# Altium PCB charger.PcbDoc
Units mil, origin at the board's own origin, x right, y up, seen from the top; angles counter-clockwise.
Board outline 944.88 x 2023.62 mil, 2 copper layers (Top Layer, Bottom Layer); 41 components, 29 nets, 116 pads, 90 vias.
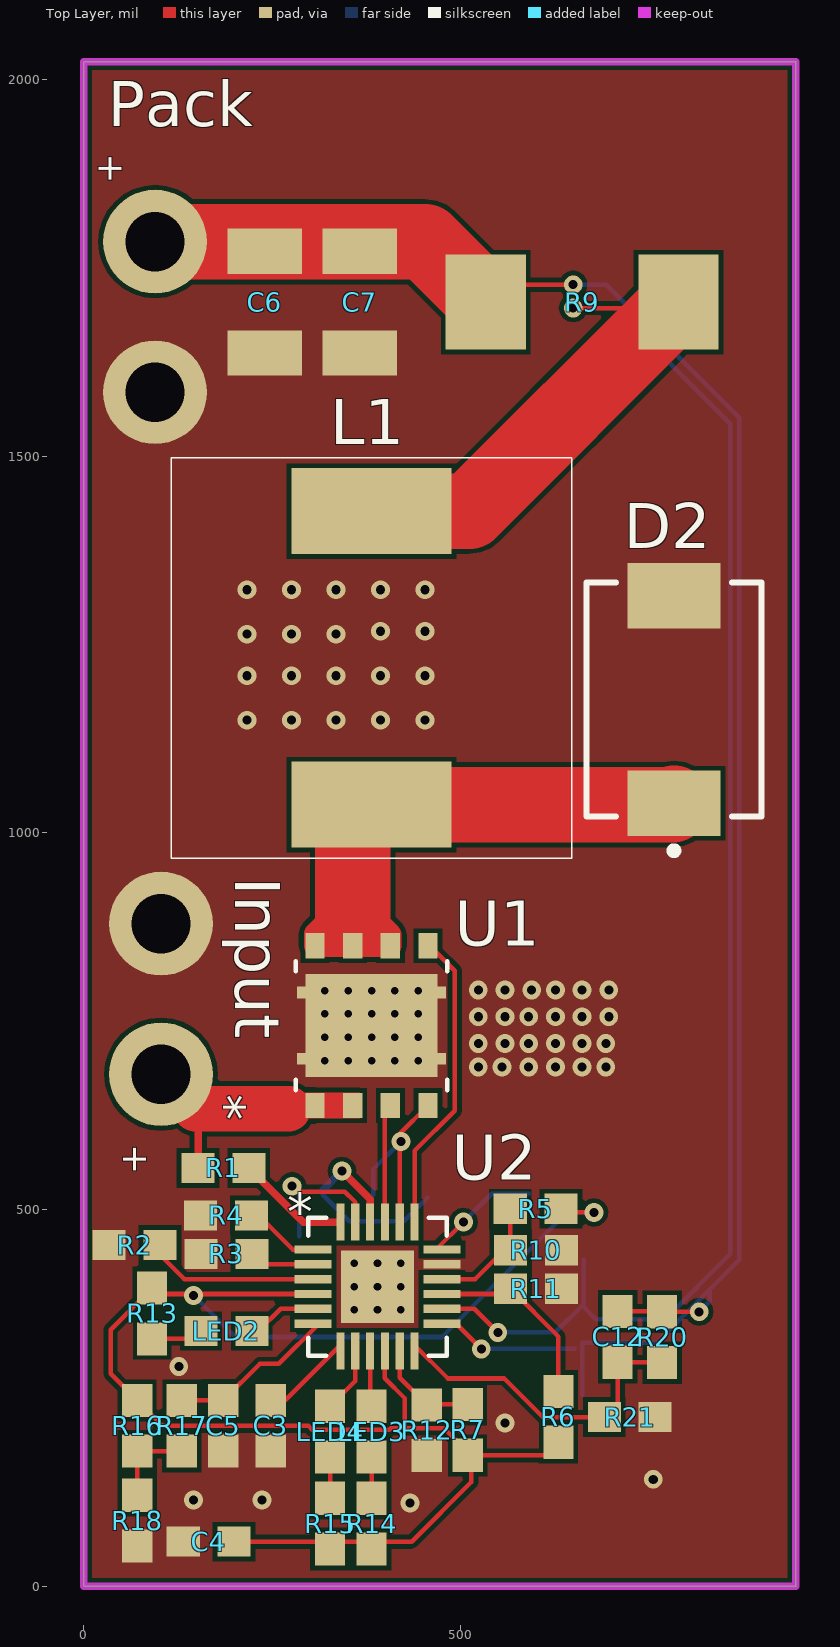
[diagram p0: Top Layer view]
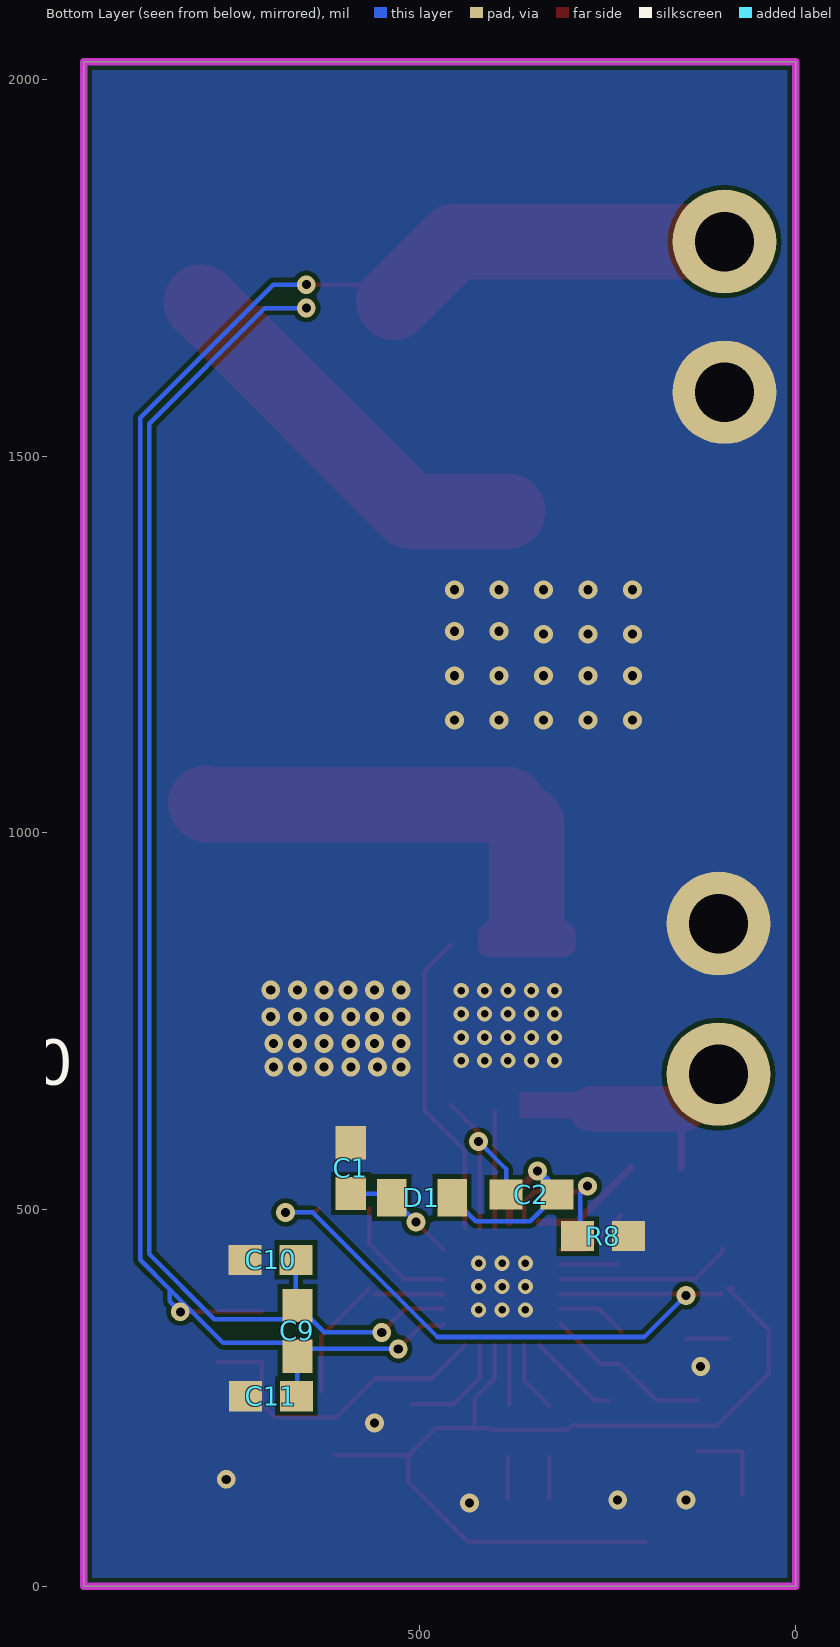
[diagram p1: Bottom Layer view, seen from below]

## Layer stack, top to bottom
Top Solder: solder mask 0.4, Solder Resist, Dk 3.5
Top Layer: signal copper 1.4
Dielectric 1: dielectric 12.6, FR-4, Dk 4.8
Bottom Layer: signal copper 1.4
Bottom Solder: solder mask 0.4, Solder Resist, Dk 3.5

## Board outline
0,0 944.88,0 944.88,2023.62 0,2023.62

## Design rules (kind name [scope] priority, off if disabled: settings)
Clearance [All] p1: gap=6
PolygonConnect [All] p1: connectstyle=Direct reliefconductorwidth=10 reliefentries=4 polygonreliefangle="90 Angle" airgapwidth=10
RoomDefinition charger [InComponentClass('charger')] p1: confinementstyle=ConfineIn formatcopy=TRUE lockcomponents=FALSE outline 2600.3,25.91 2835.3,25.91 2835.3,355.91 2600.3,355.91
RoutingVias [All] p1: holewidth=12 width=25 viastyle="Through Hole" minholewidth=12 minwidth=25 maxholewidth=28 maxwidth=50
SolderMaskExpansion [All] p1: expansion=4
UnpouredPolygon [All] p1: allowunpoured=FALSE
Width [All] p1: maxlimit=196.85 minlimit=6 preferedwidth=6
29 further rules are at their usual default settings.

## Components (designator, comment, footprint, x,y, rotation, side; value= is the part's Value field where it differs from the comment)
C1 "0.1uf" 0603 590.55,555.12 r270 bottom
C2 "0.1uf" 0603 350.39,519.69 r0 bottom
C3 "56nF" 0603 248.03,212.6 r90 top
C4 "1uF" 0603 165.35,59.06 r0 top
C5 "0.1uf" 0603 185.04,212.6 r90 top
C6 "47uf" 1210 240.16,1704.72 r90 top
C7 "47uf" 1210 366.14,1704.72 r90 top
C9 "0.1uf" 0603 661.42,338.58 r90 bottom
C10 "0.1uf" 0603 696.85,433.07 r0 bottom
C11 "0.1uf" 0603 696.85,251.97 r180 bottom
C12 "22p" 0603 708.66,330.71 r90 top
D1 "Diode" 0805 496.06,515.75 r180 bottom
D2 "Diode" SMC 783.46,1177.17 r90 top
Input "Battery_AWG12" BATTERY_AWG12 102.36,779.53 r90 top
L1 "Inductor" GDRH127 381.89,1232.28 r90 top
LED2 "LED0" 0603 188.98,338.58 r0 top
LED3 "LED0" 0603 381.89,204.72 r90 top
LED4 "LED0" 0603 326.77,204.72 r90 top
Pack "Battery_AWG12" BATTERY_AWG12 94.49,1685.04 r270 top
R1 "10R" 0603 185.04,555.12 r0 top
R2 "100k" 0603 66.93,452.76 r0 top
R3 "100k" 0603 188.98,440.95 r0 top
R4 "100k" 0603 188.98,492.13 r180 top
R5 "100k" 0603 599.95,500.99 r180 top
R6 "100k" 0603 629.92,224.41 r90 top
R7 "100k" 0603 509.57,207.13 r90 top
R8 "100k" 0603 255.91,464.57 r180 bottom
R9 "10mR" 2512 661.42,1704.72 r180 top
R10 "32.4k" 0603 599.95,445.87 r0 top
R11 "10k" 0603 599.95,394.69 r0 top
R12 "22.1k" 0603 455.23,207.13 r270 top
R13 "300R" 0603 90.55,362.21 r270 top
R14 "300R" 0603 381.89,82.68 r90 top
R15 "300R" 0603 326.77,82.68 r90 top
R16 "9.31k" 0603 70.87,212.6 r90 top
R17 "100R" 0603 129.92,212.6 r90 top
R18 "430k" 0603 70.87,86.61 r90 top
R20 "50k" 0603 767.72,330.71 r270 top
R21 "10k" 0603 724.41,224.41 r0 top
U1 "CSD87352Q5D_DQY_" CSD87352Q5D 381.89,744.09 r90 top
U2 "BQ24610_RGE_24" BQ24610 389.76,397.64 r0 top

## Footprints (in the part's own frame and the unit in brackets; to place one, negate y for a bottom-side part, rotate by r counter-clockwise, add the part's x,y. Pads: shape width x height; smd on the part's side, far side on the other; paste and mask are expansions set on the pad)
0603 [mil] "0603-RES"
  rect 44x40 smd: 1(-33.46,0) 2(34,0)
0805 [mil]
  rect 39.37x50 smd: 1(-40,0) 2(40,0)
  body extent -50,-30 50,30, height 31
1210 [mm]
  rect 1.52x2.5 smd: 1(-1.715,0) 2(1.715,0)
2512 [mm]
  rect 2.7x3.2 smd: 1(-3.25,0) 2(3.25,0)
BATTERY_AWG12 [mm]
  round 3.5 hole 2: 1(-2.54,0) 2(2.54,0)
BQ24610 [mm]
  rect 1.25x0.28 smd paste-0.14: 1(-2.175,1.25) 2(-2.175,0.75) 3(-2.175,0.25) 4(-2.175,-0.25) 5(-2.175,-0.75) 6(-2.175,-1.25) 13(2.175,-1.25) 14(2.175,-0.75) 15(2.175,-0.25) 16(2.175,0.25) 17(2.175,0.75) 18(2.175,1.25)
  rect 0.28x1.25 smd paste-0.14: 7(-1.25,-2.175) 8(-0.75,-2.175) 9(-0.25,-2.175) 10(0.25,-2.175) 11(0.75,-2.175) 12(1.25,-2.175) 19(1.25,2.175) 20(0.75,2.175) 21(0.25,2.175) 22(-0.25,2.175) 23(-0.75,2.175) 24(-1.25,2.175)
  rect 2.45x2.45 smd: 25(0,0)
  silkscreen extent -2.33,-2.33 2.33,2.33
CSD87352Q5D [mm]
  rect 0.85x0.65 smd paste-0.412: 1(-2.692,1.905) 2(-2.692,0.635) 3(-2.692,-0.635) 4(-2.692,-1.905) 5(2.692,-1.905) 6(2.692,-0.635) 7(2.692,0.635) 8(2.692,1.905)
  rect 0.4x0.3 smd: 9(-1.118,2.362) 9(-1.118,-2.362) 9(1.118,2.362) 9(1.118,-2.362)
  rect 3.48x4.46 smd paste-2.217 mask-2.222: 9(0,0)
  Top Layer region: 0,-2.23 0,-2.23 0,-2.23 0,-2.23 0,-2.23 0,-2.23 0,-2.23 0,-2.23
  Top Layer region: 0,2.23 0,2.23 0,2.23 0,2.23 0,2.23 0,2.23 0,2.23 0,2.23
  Top Layer region: -2.267,2.135 -3.117,2.135 -3.117,0.405 -2.267,0.405
  silkscreen extent -2.18,-2.55 2.18,2.55
GDRH127 [mm]
  rect 2.9x5.4 smd: 1(-4.95,0) 2(4.95,0)
  silkscreen extent -6.75,-6.75 6.75,6.75
SMC [mm]
  rect 2.2x3.15 smd: 1(-3.5,0) 2(3.5,0)
  silkscreen extent -5.22,-2.95 3.95,2.95

## Part data
C1 C2 C3 C4 C5 C6 C7 C9 C10 C11 C12: library part CAP0402-CAP, "电容"
D1 D2: "Default Diode"
LED2 LED3 LED4: "Typical INFRARED GaAs LED"
R1 R2 R3 R4 R5 R6 R7 R8 R9 R10 R11 R12 R13 R14 R15 R16 R17 R18 R20 R21: library part Res2, "电阻"
U1 U2: "Imported"

## Via types
v1: diameter 25/25 (per signal layer), hole 12, Top Layer to Bottom Layer, 50 vias
v2: diameter 20/20 (per signal layer), hole 10, Top Layer to Bottom Layer, 29 vias
v3: diameter 25, hole 12, Top Layer to Bottom Layer, 11 vias

## Nets (pads, with @x,y where several pads share a name; then routed paths per layer and width w, separated by ;. In a path a pad name is that pad's centre, name@x,y a point inside that pad or via, vN(x,y) a via of type N, cw(c..) or ccw(c..) an arc to the next point about the centre after c; other vN are vias at no path point)
GND: C1.1 C3.1 C4.1 C5.1 C6.1 C7.1 C10.2 C11.1 D2.2 Input.2 Pack.2 R2.1 R3.1 R4.2 R8.2 R10.2 R11.2 R12.2 R18.1 R21.2 U1.9 U2.17 U2.25
  other v1: 433.07,110.24 145.67,114.17 236.22,114.17 755.91,141.73 559.06,216.54 125.98,291.34 523.62,688.98 555.12,688.98 590.55,688.98 625.98,688.98 661.42,688.98 692.91,688.98 523.62,720.47 559.06,720.47 590.55,720.47 625.98,720.47 661.42,720.47 692.91,720.47 523.62,755.91 559.06,755.91 590.55,755.91 625.98,755.91 661.42,755.91 696.85,755.91 523.62,791.34 559.06,791.34 594.49,791.34 625.98,791.34 661.42,791.34 696.85,791.34 216.54,1149.61 275.59,1149.61 334.65,1149.61 393.7,1149.61 452.76,1149.61 216.54,1208.66 275.59,1208.66 334.65,1208.66 393.7,1208.66 452.76,1208.66 216.54,1263.78 275.59,1263.78 334.65,1263.78 393.7,1267.72 452.76,1267.72 216.54,1322.83 275.59,1322.83 334.65,1322.83 393.7,1322.83 452.76,1322.83
  other v2: 358.76,366.64 389.76,366.64 420.76,366.64 358.76,397.64 389.76,397.64 420.76,397.64 358.76,428.64 389.76,428.64 420.76,428.64 319.89,697.59 350.89,697.59 381.89,697.59 412.89,697.59 443.89,697.59 319.89,728.59 350.89,728.59 381.89,728.59 412.89,728.59 443.89,728.59 319.89,759.59 350.89,759.59 381.89,759.59 412.89,759.59 443.89,759.59 319.89,790.59 350.89,790.59 381.89,790.59 412.89,790.59 443.89,790.59
NetC1_2: C1.2 D1.1 U2.18 | length 154
  Top Layer w6: U2.18@467.52,446.85 v3(503.94,483.27)
  Bottom Layer w6: v3(503.94,483.27) 503.94,483.62 D1.1 541.43,521.12 C1.2@590.55,521.12
NetC2_1: C2.1 D1.2 U2.22 | length 286.5
  Top Layer w10: v3(342.52,551.18) 379.92,513.78 U2.22
  Bottom Layer w6: C2.1 352.36,484.25 424.57,484.25 D1.2
  Bottom Layer w10: C2.1@316.93,525.59 v3(342.52,551.18)
NetC2_2: C2.2 U1.4 U2.20 | length 266.8
  Top Layer w6: U2.20@419.3,475.39 U2.20 v3@419.3,588.65 ; v3(421.11,590.46) v3@419.3,588.65 ; U1.4 419.3,600.5 v3@419.3,588.65
  Bottom Layer w6: C2.2 384.39,553.75 v3(421.11,590.46)
NetC3_2: C3.2 U2.7 | length 122.9
  Top Layer w6: C3.2 267.26,246.6 U2.7@340.54,319.88
NetC5_2: C5.2 R17.2 U2.6 | length 224.3
  Top Layer w6: R17.2 C5.2 233.72,295.28 258.86,295.28 U2.6@312.01,348.42
NetC6_2: C6.2 C7.2 C9.1 C11.2 C12.2 Pack.1 R9.2 R20.1 U2.13 | length 2674.5
  Top Layer w6: U2.13@467.52,348.42 470.52,345.42 497.09,345.42 v3(527.56,314.96) ; R9.2 556.59,1727.85 v3(649.61,1727.85) ; C12.2 R20.1@767.18,364.71 ; R20.1 v3(816.93,364.17)
  Top Layer w100: Pack.1 453.15,1785.04 R9.2
  Bottom Layer w6: v3(527.56,314.96) C9.1@651.58,314.96 ; v3(649.61,1727.85) 693.41,1727.85 870.27,1550.99 870.27,433.26 830.71,393.7 ; C11.2@661.42,253.4 661.42,322.83 759.84,322.83 830.71,393.7 ; v3(816.93,364.17) 830.71,377.95 830.71,393.7
NetC9_2: C9.2 C10.1 L1.2 R9.1 U2.14 | length 2549.4
  Top Layer w6: U2.14@467.52,368.11 518.25,368.11 v3(549.48,336.88) ; v3(649.61,1696.85) R9.1@781.49,1696.85
  Top Layer w100: L1.2 511.81,1427.16 781.49,1696.85 R9.1
  Bottom Layer w6: v3(549.48,336.88) 625.72,336.88 C9.2 679.67,354.33 771.65,354.33 858.27,440.94 858.27,1543.31 704.72,1696.85 v3(649.61,1696.85) ; C9.2@663.38,374.55 C10.1
NetC12_1: C12.1 R20.2 R21.1 U2.12 | length 430.2
  Top Layer w6: U2.12@438.99,319.88 483.28,275.59 558.01,275.59 609.19,224.41 R21.1 708.66,242.13 C12.1 R20.2@767.18,297.24
NetD2_2: D2.1 L1.1 U1.6 U1.7 U1.8 | length 724.6
  Top Layer w30: 330.71,889.76 306.89,865.95 U1.8 U1.7 U1.6 406.89,864.76 381.89,889.76
  Top Layer w100: 356.89,889.76 L1.1@356.89,1012.4 ; L1.1 781.5,1037.4 D2.1
NetLED2_1: LED2.1 R13.2 | length 54.6
  Top Layer w6: R13.2@90.55,328.2 LED2.1@145.14,328.2
NetLED2_2: LED2.2 U2.5 | length 92.4
  Top Layer w6: LED2.2@231.8,338.58 261.32,368.11 U2.5@312.01,368.11
NetLED3_1: LED3.1 R14.2 | length 54.6
  Top Layer w6: R14.2 LED3.1
NetLED3_2: LED3.2 U2.9 | length 79.2
  Top Layer w6: LED3.2@379.92,240.7 U2.9@379.92,319.88
NetLED4_1: LED4.1 R15.2 | length 54.6
  Top Layer w6: R15.2 LED4.1
NetLED4_2: LED4.2 U2.8 | length 95
  Top Layer w6: LED4.2 360.23,272.18 U2.8@360.23,319.88
NetR1_2: R1.2 U2.24 | length 151.3
  Top Layer w10: R1.2 290.89,483.27 U2.24
NetR2_2: R2.2 U2.3 | length 235
  Top Layer w6: R2.2@96.99,448.82 96.99,443.96 133.47,407.48 U2.3@312.01,407.48
NetR3_2: R3.2 U2.2 | length 75.3
  Top Layer w6: R3.2@236.76,427.17 U2.2@312.01,427.17
NetR4_1: R4.1 U2.1 | length 99
  Top Layer w6: R4.1@231.8,492.13 277.07,446.85 U2.1@312.01,446.85
NetR5_2: R5.2 R10.1 U2.16 | length 164.6
  Top Layer w6: U2.16@467.52,407.48 519.28,407.48 565.95,454.16 R5.2
NetR6_2: R6.2 R11.1 U2.15 | length 254.6
  Top Layer w6: U2.15@467.52,387.79 R11.1@559.59,387.79 ; R11.1 629.92,331.26 R6.2
NetR7_2: R7.2 R12.1 U2.11 | length 148.3
  Top Layer w6: U2.11@419.3,319.88 419.3,276.53 454.7,241.13 R7.2
NetR8_1: R8.1 U2.23 | length 189.5
  Top Layer w6: v3(276.43,530.96) 283.77,523.62 346.46,523.62 360.23,509.85 U2.23
  Bottom Layer w6: v3(276.43,530.96) 285.93,521.46 R8.1@285.93,464.57
NetR16_1: R16.1 R17.1 R18.2 | length 117.6
  Top Layer w6: R18.2 R16.1 R17.1
NetU1_3: U1.3 U2.21 | length 155.4
  Top Layer w6: U2.21@399.61,475.39 U1.3@399.61,630.81
NetU1_5: U1.5 U2.19 | length 412.6
  Top Layer w6: U2.19@438.99,475.39 438.99,577.94 492.27,631.22 492.27,816.8 458.97,850.09 U1.5
VCC: Input.1 R1.1 U1.1 U1.2 | length 294.4
  Top Layer w10: R1.1 151.58,630.32
  Top Layer w35: 275.89,638.09 U1.1
  Top Layer w60: Input.1 148.03,633.86 271.65,633.86
VREF: C4.2 R5.1 R6.1 R7.1 R13.1 R14.1 R15.1 R16.2 U2.4 U2.10 | length 2159.2
  Top Layer w6: R13.1@82.68,395.67 90.55,395.67 35.43,340.55 35.43,282.03 R16.2 104.87,212.6 298.17,212.6 303.04,207.72 405.62,207.72 407.49,209.6 478.03,209.6 R7.1@513.96,173.67 ; R13.1@98.43,387.79 U2.4@312.01,387.79 ; C4.2 435.19,59.05 514.28,138.15 514.28,173.35 R7.1@513.96,173.67 ; U2.10@399.61,319.88 399.61,275.73 426.23,249.11 426.23,209.6 ; R7.1 R7.1@513.96,173.67 ; R6.1@612.65,173.67 R7.1@513.96,173.67 ; R5.1 638.35,496.06 v3(677.17,496.06)
  Bottom Layer w6: v3(145.67,385.83) 200.79,330.71 475.5,330.71 640.85,496.06 v3(677.17,496.06)

## Polygon pours and split planes (outlines as drawn)
GND on Top Layer "Top Layer-No Net" (solid, remove dead copper, pour order 2): 0,2023.62 944.88,2023.62 944.88,0 0,0
GND on Bottom Layer "Top Layer-No Net" (solid, remove dead copper, pour order 4): 0,2023.62 944.88,2023.62 944.88,0 0,0

## Keep-outs
Keep-Out Layer:
  the board outline again, w10

## Silkscreen, mask and mechanical layers (free items; w line width, h text height)
Top Solder:
  rectangle: 507.87,551.18 842.52,960.63
  lines w100: 94.49,1785.04 455.12,1785.04 535.43,1704.72 ; 385.83,1425.2 507.87,1425.2 775.59,1692.91
Bottom Solder:
  rectangle: 196.85,629.92 787.4,1586.61

## Text inside footprints (layer, text, board x,y; h text height)
Input: Top Overlay "+" at 82.68,586.61 h35 r90
Pack: Top Overlay "+" at 19.69,1862.21 h35 r270
U1: Top Overlay "*" at 236.3,618.75 h50 r90
U2: Top Overlay "*" at 270.28,471.69 h50; Mechanical 13 "*" at 270.28,471.69 h50